# Altium PCB PCB1.PcbDoc
Units mm, origin at the board's own origin, x right, y up, seen from the top; angles counter-clockwise.
Board outline 28 x 38 mm, 2 copper layers (Top Layer, Bottom Layer), stack 0.325 mm thick; 44 components, 34 nets, 206 pads, 75 vias.
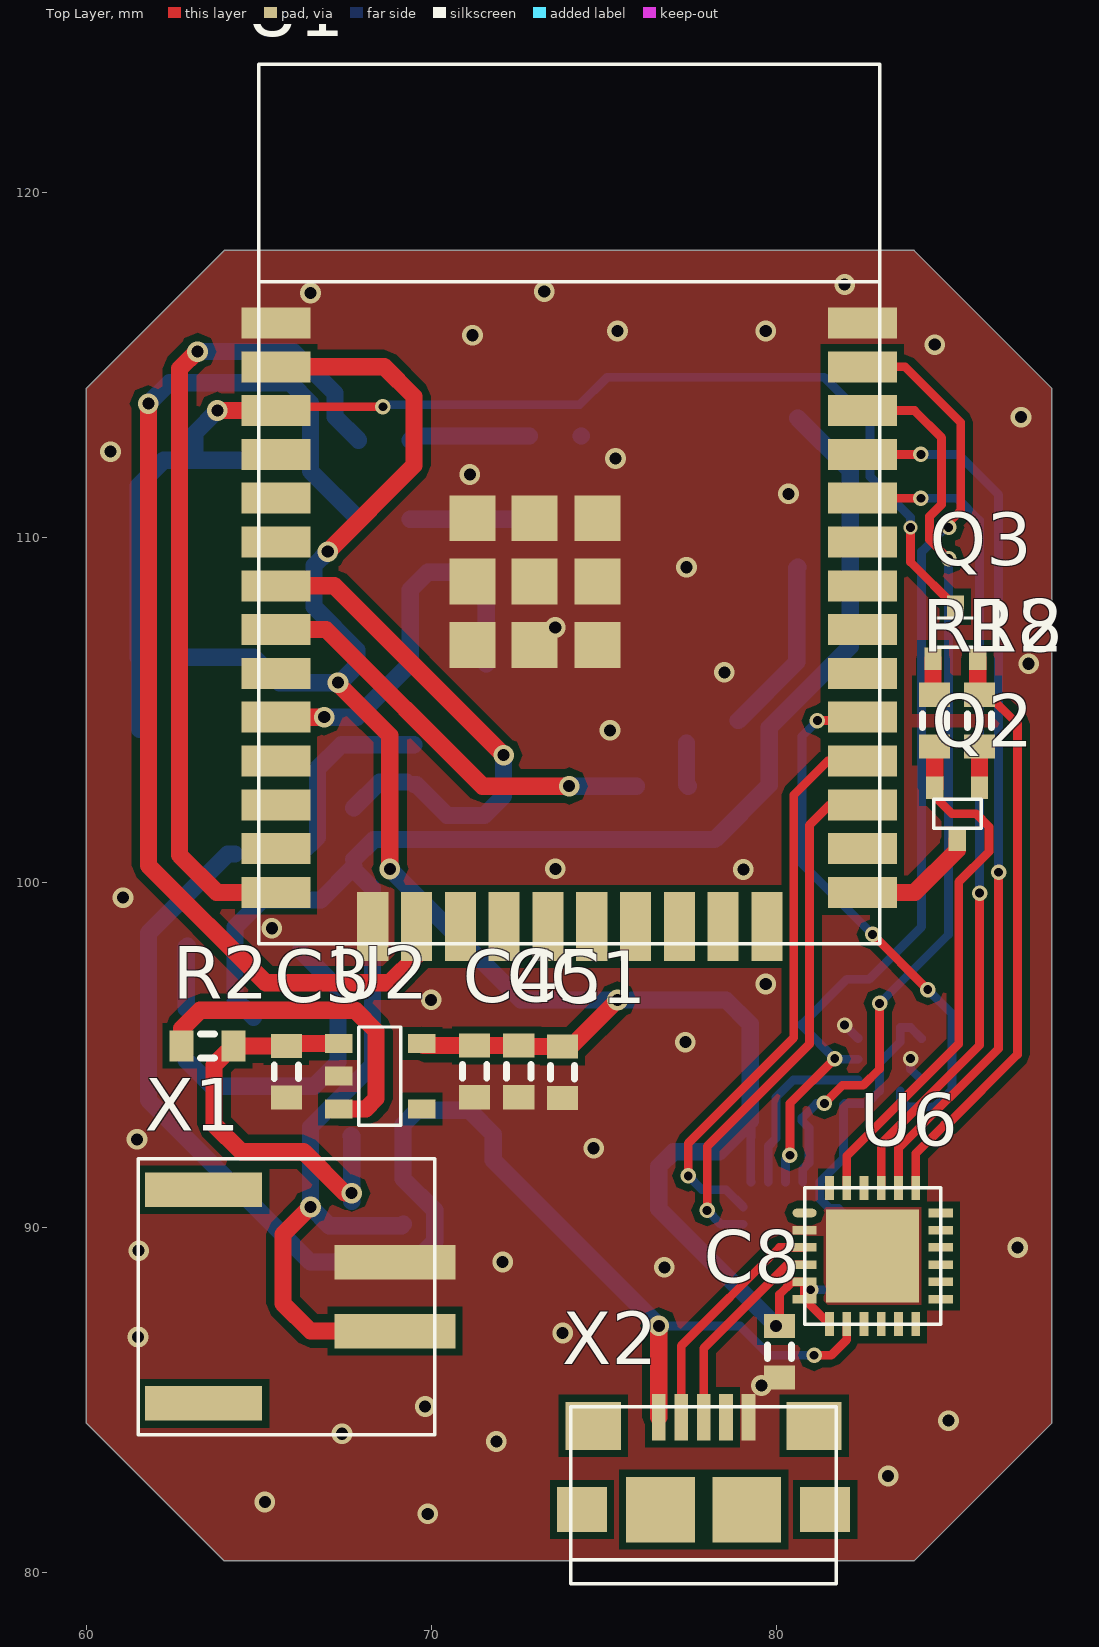
[diagram p0: Top Layer view]
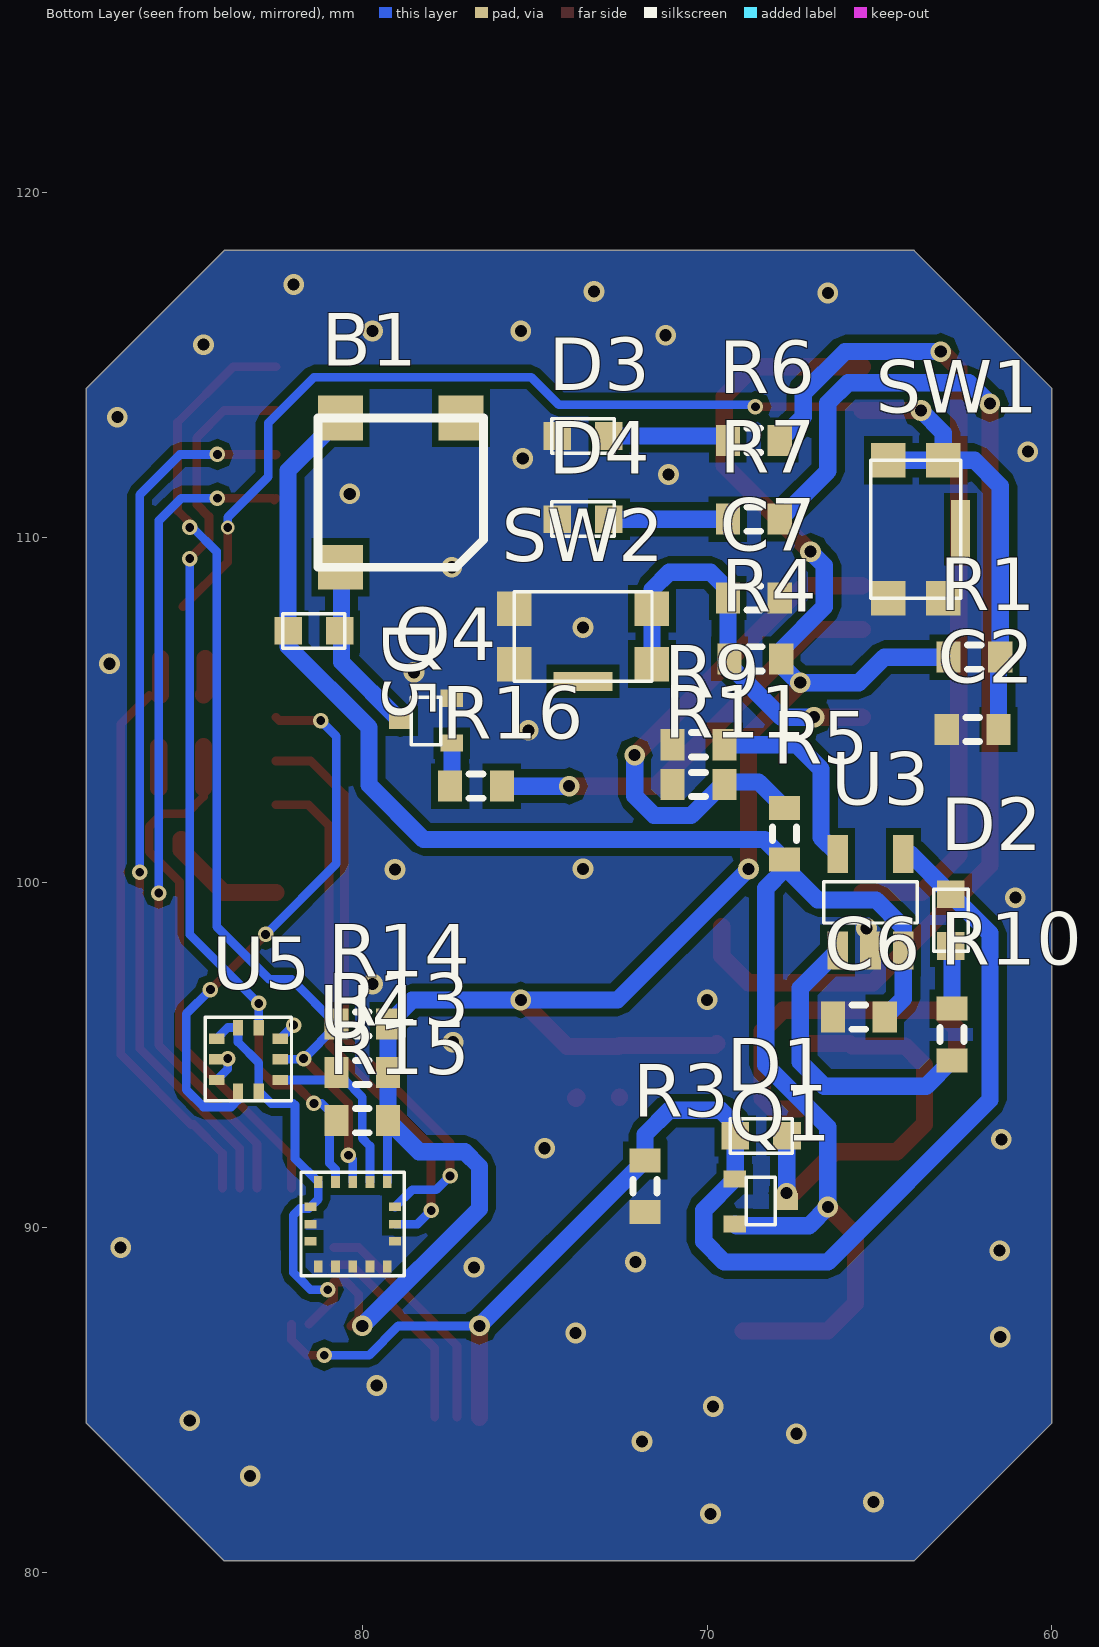
[diagram p1: Bottom Layer view, seen from below]

## Layer stack, top to bottom
Top Solder: solder mask 0.0102, Solder Resist, Dk 3.5
Top Layer: signal copper 0.0356
Dielectric 1: core 0.254, FR-4, Dk 4.2
Bottom Layer: signal copper 0.0356
Bottom Solder: solder mask 0.0102, Solder Resist, Dk 3.5

## Board outline
64,80.333 60,84.333 60,114.333 64,118.333 84,118.333 88,114.333 88,84.333 84,80.333

## Design rules (kind name [scope] priority, off if disabled: settings)
Clearance Clearance_1 [InNamedPolygon('Bottom Layer-No Net') Or  InNamedPolygon('GND_L01_P008')] p1: gap=0.254 ignorepadtopadclearanceinfootprint=FALSE except(0: Arc-Hole Track-Hole SMDPad-Hole THPad-Hole Via-Hole Fill-Hole Poly-Hole Region-Hole Text-Hole)
Clearance [All] p2: gap=0.2 ignorepadtopadclearanceinfootprint=TRUE
PolygonConnect PolygonConnect_5 [All vs IsNamedPolygon('GND_L01_P014')] p1: connectstyle=Direct reliefconductorwidth=0.254 reliefentries=4 polygonreliefangle="90 Angle" airgapwidth=0.254
PolygonConnect PolygonConnect_4 [All vs IsNamedPolygon('GND_L01_P014')] p2: connectstyle=Direct reliefconductorwidth=0.254 reliefentries=4 polygonreliefangle="90 Angle" airgapwidth=0.254
PolygonConnect PolygonConnect_3 [All vs IsNamedPolygon('NONET_L01_P014')] p3: connectstyle=Direct reliefconductorwidth=0.254 reliefentries=4 polygonreliefangle="90 Angle" airgapwidth=0.254
PolygonConnect PolygonConnect_2 [All vs IsNamedPolygon('GND_L02_P013')] p4: connectstyle=Direct reliefconductorwidth=0.254 reliefentries=4 polygonreliefangle="90 Angle" airgapwidth=0.254
PolygonConnect PolygonConnect_1 [All vs IsNamedPolygon('Bottom Layer-No Net') Or  IsNamedPolygon('GND_L01_P008')] p5: thpad.connectstyle=Direct thpad.reliefconductorwidth=0.254 thpad.reliefentries=4 thpad.polygonreliefangle="90 Angle" thpad.airgapwidth=0.254 smdpad.connectstyle=Direct smdpad.reliefconductorwidth=0.254 smdpad.reliefentries=4 smdpad.polygonreliefangle="90 Angle" smdpad.airgapwidth=0.254 via.connectstyle=Relief via.reliefconductorwidth=0.254 via.reliefentries=4 via.polygonreliefangle="90 Angle" via.airgapwidth=0.254
PolygonConnect [All] p6: connectstyle=Relief reliefconductorwidth=0.254 reliefentries=4 polygonreliefangle="90 Angle" airgapwidth=0.254
RoutingVias [All] p1: holewidth=0.711 width=1.27 viastyle="Through Hole" minholewidth=0.711 minwidth=1.27 maxholewidth=0.711 maxwidth=1.27
SolderMaskExpansion [All] p1: expansion=0.102
UnConnectedPin [All] p1:
Width [All] p1: maxlimit=0.5 minlimit=0.1 preferedwidth=0.254 minimp=50.000000 maximp=50.000000 favimp=50.000000
30 further rules are at their usual default settings.

## Components (designator, comment, footprint, x,y, rotation, side; value= is the part's Value field where it differs from the comment)
B1 "Magnetic Buzzer Transducer" "CMT-0502 Buzzer" 78.932,112.572 r270 bottom
C1 "Cap Semi" J1-0603 73.809,94.503 r90 top value=100pF
C2 "Cap Semi" J1-0603 62.3,104.441 r180 bottom value=100pF
C3 "Cap Semi" J1-0603 65.799,94.518 r90 top value=100pF
C4 "Cap Semi" J1-0603 71.26,94.53 r90 top value=100pF
C5 "Cap Semi" J1-0603 72.539,94.53 r90 top value=100pF
C6 "Cap Semi" J1-0603 65.6,96.1 r180 bottom value=100pF
C7 "Cap Semi" J1-0603 68.645,108.254 r0 bottom value=100pF
C8 "Cap Semi" J1-0603 80.1,86.4 r90 top value=100pF
D1 "MBR120_Diode" SML_LED 68.432,92.662 r180 bottom
D2 "Green" SML_LED 62.931,98.915 r270 bottom
D3 "Green" SML_LED 73.598,112.953 r0 bottom
D4 "Green" SML_LED 73.598,110.54 r0 bottom
D5 "Diode" SML_LED 81.4,107.3 r0 bottom
Q1 "DMG3415U" SOT323 69.194,91.407 r180 bottom
Q2 "NPN BJT Transistor" SOT323 85.9,102.75 r270 top
Q3 "NPN BJT Transistor" SOT323 84.55,106.5 r90 top
Q4 "NPN BJT Transistor" SOT323 77.4,104.05 r0 bottom
R1 "Res3" J1-0603 62.25,106.541 r180 bottom value=1K
R2 "Res3" J1-0603 63.513,95.268 r180 top value=1K
R3 "Res3" J1-0603 71.8,91.2 r270 bottom value=1K
R4 "Res3" J1-0603 68.6,106.491 r0 bottom value=1K
R5 "Res3" J1-0603 67.757,101.421 r90 bottom value=1K
R6 "Res3" J1-0603 68.645,112.826 r0 bottom value=1K
R7 "Res3" J1-0603 68.645,110.54 r0 bottom value=1K
R8 "Res3" J1-0603 85.9,104.7 r270 top value=1K
R9 "Res3" J1-0603 70.25,104 r180 bottom value=1K
R10 "Res3" J1-0603 62.9,95.6 r90 bottom value=1K
R11 "Res3" J1-0603 70.25,102.85 r0 bottom value=1K
R12 "Res3" J1-0603 84.6,104.7 r90 top value=1K
R13 "Res3" J1-0603 80,94.5 r180 bottom value=1K
R14 "Res3" J1-0603 80,95.9 r180 bottom value=1K
R15 "Res3" J1-0603 80,93.1 r180 bottom value=1K
R16 "Res3" J1-0603 76.7,102.8 r180 bottom value=1K
SW1 "KMR2_Microminiature_SMT_Switch" "KMR 2 Microswitch" 63.05,111.248 r270 bottom
SW2 "KMR2_Microminiature_SMT_Switch" "KMR 2 Microswitch" 72.598,106.241 r0 bottom
U1 "ESP32-WROOM-32" ESP_WROOM_32 43.8,119.53 r0 top
U2 "Regulator" SOT25 67.323,95.341 r0 top
U3 "LIPO CHARGER" SOT-23 66.212,98.032 r90 bottom
U4 "LSM6DS33" LSM6DS33 79.575,92.1 r180 bottom
U5 "LPS25H" LPS25HB 83.025,94.075 r90 bottom
U6 "UART/USB Converter" CP2104-GM 80.825,90.425 r0 top
X1 "JST-2PIN_Connector" JST-2PIN 63.4,91.1 r270 top
X2 "MicroB_20329_Connector" Micro_B_USB_smd 76.85,81.75 r0 top

## Footprints (in the part's own frame and the unit in brackets; to place one, negate y for a bottom-side part, rotate by r counter-clockwise, add the part's x,y. Pads: shape width x height; smd on the part's side, far side on the other; paste and mask are expansions set on the pad)
"CMT-0502 Buzzer" [mm]
  rect 1.3x1.3 smd: 1(-0.9,-1.7) 2(3.425,-1.7) NC(-0.9,1.8)
  silkscreen extent -0.9,-2.35 3.42,2.45
CP2104-GM [mm]
  oval 0.7x0.25 smd: 1(0,0)
  rect 0.7x0.25 smd: 2(0,-0.5) 3(0,-1) 4(0,-1.5) 5(0,-2) 6(0,-2.5) 13(3.95,-2.5) 14(3.95,-2) 15(3.95,-1.5) 16(3.95,-1) 17(3.95,-0.5) 18(3.95,0)
  rect 0.25x0.7 smd: 7(0.725,-3.225) 8(1.225,-3.225) 9(1.725,-3.225) 10(2.225,-3.225) 11(2.725,-3.225) 12(3.225,-3.225) 19(3.225,0.725) 20(2.725,0.725) 21(2.225,0.725) 22(1.725,0.725) 23(1.225,0.725) 24(0.725,0.725)
  rect 2.7x2.7 smd: 25(1.975,-1.25)
  silkscreen extent 0,-3.23 3.95,0.73
ESP_WROOM_32 [mm]
  rect 2x0.9 smd: 1(21.7,-3.3) 2(21.7,-4.57) 3(21.7,-5.84) 4(21.7,-7.11) 5(21.7,-8.38) 6(21.7,-9.65) 7(21.7,-10.92) 8(21.7,-12.19) 9(21.7,-13.46) 10(21.7,-14.73) 11(21.7,-16) 12(21.7,-17.27) 13(21.7,-18.54) 14(21.7,-19.81) 25(38.7,-19.81) 26(38.7,-18.54) 27(38.7,-17.27) 28(38.7,-16) 29(38.7,-14.73) 30(38.7,-13.46) 31(38.7,-12.19) 32(38.7,-10.92) 33(38.7,-9.65) 34(38.7,-8.38) 35(38.7,-7.11) 36(38.7,-5.84) 37(38.7,-4.57) 38(38.7,-3.3)
  rect 0.9x2 smd: 15(24.505,-20.8) 16(25.775,-20.8) 17(27.045,-20.8) 18(28.315,-20.8) 19(29.585,-20.8) 20(30.855,-20.8) 21(32.125,-20.8) 22(33.395,-20.8) 23(34.665,-20.8) 24(35.935,-20.8)
  rect 1.33x1.33 smd: 39(27.4,-12.638) 39(27.4,-10.8) 39(27.4,-8.963) 39(29.2,-12.638) 39(29.2,-10.8) 39(29.2,-8.962) 39(31.025,-12.638) 39(31.025,-10.8) 39(31.025,-8.962)
  silkscreen extent 21.2,-21.3 39.2,4.2
J1-0603 [mm] "Chip Resistor, Body 1.6x0.8mm, IPC High Density"
  rect 0.7x0.9 smd: 1(-0.75,0) 2(0.75,0)
  silkscreen extent -0.2,-0.35 0.2,0.35, body extent -0.85,-0.48 0.85,0.48, height 0.9
JST-2PIN [mm]
  rect 1x3.5 smd: 1(2.1,5.55) 2(4.1,5.55)
  rect 1x3.4 smd: NC(0,0) NC(6.2,0)
  silkscreen extent -0.9,-1.9 7.1,6.7
"KMR 2 Microswitch" [mm]
  rect 1x1 smd: 1(-1,-0.1) 2(-1,-1.7) 3(3,-0.1) 4(3,-1.7)
  rect 1.7x0.55 smd: GND(1,0.4)
  silkscreen extent -1,-2.2 3,0.4
LPS25HB [mm]
  rect 0.45x0.3 smd: 1(1.725,0.575) 2(1.725,-0.025) 6(-0.115,-0.025) 7(-0.115,0.575)
  rect 0.3x0.45 smd: 3(1.405,-0.645) 4(0.805,-0.645) 5(0.205,-0.645) 8(0.205,1.195) 9(0.805,1.195) 10(1.405,1.195)
  silkscreen extent -0.4,-0.98 2.02,1.53
LSM6DS33 [mm]
  rect 0.25x0.35 smd: 1(-1.7,-0.775) 2(-1.2,-0.775) 3(-0.7,-0.775) 4(-0.2,-0.775) 5(0.3,-0.775) 9(0.3,-3.225) 10(-0.2,-3.225) 11(-0.7,-3.225) 12(-1.2,-3.225) 13(-1.7,-3.225)
  rect 0.35x0.25 smd: 6(0.525,-1.5) 7(0.525,-2) 8(0.525,-2.5) 14(-1.925,-2.5) 15(-1.925,-2) 16(-1.925,-1.5)
  silkscreen extent -2.2,-3.5 0.8,-0.5
Micro_B_USB_smd [mm]
  rect 0.4x1.35 smd: 1(-0.25,2.75) 2(0.4,2.75) 3(1.05,2.75) 4(1.7,2.75) 5(2.35,2.75)
  rect 1.45x1.3 smd: NC(-2.475,0.075) NC(4.575,0.075)
  rect 1.6x1.4 smd: NC(-2.15,2.5) NC(4.25,2.5)
  rect 2x1.9 smd: NC(-0.2,0.075) NC(2.3,0.075)
  silkscreen extent -2.8,-2.07 4.9,3.05
SML_LED [mm]
  rect 0.8x0.8 smd: 1(-0.75,0) 2(0.75,0)
  silkscreen extent -0.9,-0.5 0.9,0.5
SOT25 [mm]
  rect 0.8x0.55 smd: 1(0,0) 2(0,-0.95) 3(0,-1.9) 4(2.4,-1.9) 5(2.4,0)
  silkscreen extent 0.58,-2.38 1.8,0.47
SOT323 [mm]
  rect 0.65x0.5 smd: 1(0,-1.3) 2(0,0) 3(1.5,-0.65)
  silkscreen extent 0.33,-1.33 1.17,0.05
SOT-23 [mm]
  rect 1.1x0.6 smd: 1(0,0) 2(0,-0.95) 3(0,-1.9) 4(2.8,-1.9) 5(2.8,0)
  silkscreen extent 0.8,-2.3 2,0.4

## Part data
B1: library part CMT-0502-75-SMT-TR
C1 C2 C3 C4 C5 C6 C7 C8: "Capacitor (Semiconductor SIM Model)", LatestRevisionDate=29-May-2009, LatestRevisionNote="IPC-7351 Footprint Added.", PackageDescription="Chip Capacitor", PackageReference=C1206, Published=8-Jun-2000, Publisher="Altium Limited"
D2 D3 D4: library part SML-LX0603GW-TR_LED_Diode
D5: "Default Diode", Code_JEDEC=DO-214-AB, LatestRevisionDate=17-Jul-2002, LatestRevisionNote="Re-released for DXP Platform.", PackageDescription="DO-214-AB/SMC; 2 C-Bend Leads; Body 7.9 x 5.9 mm, inc. leads (LxW)", PackageReference=SMC, PackageVersion=Sep-1996, Published=8-Jun-2000, Publisher="Altium Limited"
Q2 Q3 Q4: library part 2sd1484k
R1 R2 R3 R4 R5 R6 R7 R8 R9 R10 R11 R12 R13 R14 R15 R16: "Resistor", LatestRevisionDate=29-May-2009, LatestRevisionNote="IPC-7351 Footprint Added.", PackageDescription="Chip Resistor", PackageReference=J1-0603, Published=8-Jun-2000, Publisher="Altium Limited"
U2: library part AP2112-3.3
U3: library part MCP7381/2
U6: library part CP2104

## Via types
v1: diameter 0.6, hole 0.35, Top Layer to Bottom Layer, 54 vias
v2: diameter 0.45, hole 0.256, Top Layer to Bottom Layer, 20 vias
v3: diameter 0.4, hole 0.256, Top Layer to Bottom Layer, 1 vias

## Nets (pads, with @x,y where several pads share a name; then routed paths per layer and width w, separated by ;. In a path a pad name is that pad's centre, name@x,y a point inside that pad or via, vN(x,y) a via of type N, cw(c..) or ccw(c..) an arc to the next point about the centre after c; other vN are vias at no path point)
3.3V: C1.2 C4.2 C5.2 C8.2 R1.1 R4.1 R13.2 R14.2 R15.2 U1.2 U2.5 U4.1 U4.5 U4.16 U5.1 U5.6 U5.10 U6.5 U6.6 U6.7 | length 71.8
  Top Layer w0.254: C8.2@80.325,87.15 80.1,87.375 80.1,88.058 80.467,88.425 U6.5 U6.6 U6.7
  Top Layer w0.5: U1.2 68.64,114.96 69.5,114.1 69.5,112.1 v1(67,109.6) ; v1(67.3,105.8) 67.3,105.77 68.8,104.27 v1(68.8,100.4) ; U2.5 69.784,95.28 C4.2 C5.2 72.566,95.253 C1.2 74.053,95.253 v1(75.4,96.6)
  Bottom Layer w0.254: R15.2 79.275,93.075 79.275,92.617 79.269,92.611 79.269,91.331 U4.5 ; v2(81,88.2) 81.5,88.2 81.8,88.5 82,88.7 82,89.338 82.002,89.34 82.002,90.36 81.81,90.552 81.548,90.552 U4.16 81.275,90.825 U4.1 81.952,92.002 81.952,93.552 82,93.6 82.64,93.6 U5.6 83,94.781 83.6,95.381 U5.1 83.9,95.8 U5.10
  Bottom Layer w0.5: R1.1 64.859,106.541 65.6,105.8 v1(67.3,105.8) 67.346,105.8 R4.1@67.895,106.349 ; v1(67,109.6) 66.6,109.2 66.6,108 67.85,106.75 R4.1 ; v1(68.8,100.4) 72.6,96.6 v1(75.4,96.6) 78.55,96.6 R14.2 R15.2 78.35,92.2 77.029,92.2 76.6,91.771 76.6,90.55 v1(80,87.15)
DTR: Q2.1 R12.1 U6.23 | length 15.6
  Top Layer w0.254: U6.23 82.05,92.076 85.3,95.326 85.3,100.025 86.175,100.9 86.175,101.625 85.8,102 85.1,102 84.6,102.5 Q2.1
  Top Layer w0.5: Q2.1 R12.1
GND: C1.1 C2.1 C3.1 C4.1 C5.1 C6.1 C7.1 C8.1 D3.2 D4.2 Q4.1 R3.2 R9.1 R11.2 SW1.3 SW1.4 SW2.3 SW2.4 U1.1 U1.15 U1.38 U1.39 U2.2 U3.2 U4.8 U4.9 U4.10 U4.11 U4.12 U4.13 U4.15 U5.3 U5.8 U5.9 U6.2 U6.25 X1.1 X2.5 | length 1.4
  Top Layer w0.5: C1.1@73.782,93.78 C1.1
  Bottom Layer w0.254: v2(81.988,95.871) U5.3 U5.3@82.38,95.497 ; v2(83.9,94.9) 83.9,94.6 U5.8
  other v1: 69.9,81.7 65.176,82.042 83.25,82.8 71.889,83.8 67.412,84.023 85,84.402 69.825,84.811 79.578,85.42 61.5,86.829 73.812,86.944 76.759,88.849 72.074,89 61.519,89.332 87.004,89.425 74.711,92.3 61.468,92.558 77.368,95.377 70,96.604 79.7,97.061 65.38,98.679 61.063,99.567 79.05,100.382 73.601,100.401 75.184,104.419 78.5,106.1 87.325,106.35 73.598,107.4 77.4,109.147 80.362,111.274 71.12,111.836 75.346,112.3 60.7,112.5 87.1,113.5 84.6,115.6 71.2,115.875 75.4,116 79.7,116 66.5,117.1 73.279,117.145 81.988,117.348
GPIO0: Q2.3 U1.25 | length 3.6
  Top Layer w0.5: U1.25 84.02,99.72 85.25,100.95 Q2.3
I35: R5.2 R11.1 U1.7 | length 14.9
  Top Layer w0.5: U1.7 67.19,108.61 v1(72.1,103.7)
  Bottom Layer w0.5: R5.2 68.507,102.921 R11.1@69.281,102.921 ; R11.1 69.564,102.85 70.464,101.95 71.536,101.95 72.1,102.514 v1(72.1,103.7)
INT1: U1.27 U4.7 | length 15.4
  Top Layer w0.254: v2(78,90.5) 78.004,90.504 78.004,92.358 80.966,95.32 80.966,101.666 81.56,102.26 U1.27
  Bottom Layer w0.254: v2(78,90.5) 78.4,90.1 U4.7
INT2: U1.28 U4.6 | length 16.7
  Top Layer w0.254: v2(77.452,91.5) 77.452,92.448 80.512,95.508 80.512,102.545 81.497,103.53 U1.28
  Bottom Layer w0.254: v2(77.452,91.5) 77.852,91.1 78.55,91.1 U4.6
INT3: U1.29 U5.7 | length 16.1
  Top Layer w0.254: v2(81.2,104.7) 82.4,104.7 U1.29 ; v2(82.8,98.5) v2(84.4,96.9)
  Bottom Layer w0.254: v2(81.2,104.7) 80.75,104.25 80.75,100.55 v2(82.8,98.5) ; U5.7 83.6,93.7 83.8,93.5 84.6,93.5 85.1,94 85.1,96.2 v2(84.4,96.9)
IO12: R6.1 U1.14 | length 24.2
  Top Layer w0.5: v1(63.225,115.4) 63.2,115.4 62.7,114.9 62.7,100.8 63.78,99.72 U1.14
  Bottom Layer w0.5: v1(63.225,115.4) 66,115.4 67.211,114.189 67.211,113.51 R6.1
IO13: R7.1 U1.16 | length 32.9
  Top Layer w0.5: v1(61.8,113.889) 61.8,100.5 65.2,97.1 68.8,97.1 69.575,97.875 U1.16
  Bottom Layer w0.5: v1(61.8,113.889) 62.411,114.5 65.91,114.5 66.5,113.91 66.5,111.935 R7.1
IO25: C7.2 R4.2 SW2.1 SW2.2 U1.10 | length 11.5
  Top Layer w0.5: U1.10 v1(66.9,104.8)
  Bottom Layer w0.5: v1(66.9,104.8) 67.846,104.8 69.395,106.349 C7.2 69.395,108.495 69.9,109 71.1,109 71.598,108.502 SW2.2 SW2.1
IO32: R16.2 U1.8 | length 12.3
  Top Layer w0.5: U1.8 66.95,107.34 71.49,102.8 v1(74,102.8)
  Bottom Layer w0.5: v1(74,102.8) R16.2
NetB1_2: B1.2 D5.1 Q4.3 | length 5.2
  Bottom Layer w0.5: Q4.3 80.6,106.4 80.6,109.115 B1.2
NetC3_2: C3.2 D1.2 Q1.3 R2.1 U2.1 | length 12.3
  Top Layer w0.5: U2.1 65.872,95.341 C3.2 R2.1 63.7,94.705 63.7,93 64.5,92.2 66.3,92.2 67.5,91 v1(67.694,91)
  Bottom Layer w0.5: D1.2 67.694,92.65 v1(67.694,91) Q1.3
NetD2_2: D2.2 R10.2 | length 1.8
  Bottom Layer w0.5: R10.2 62.9,98.134 D2.2
NetD3_1: D3.1 R6.2 | length 3.5
  Bottom Layer w0.5: R6.2 69.522,112.953 D3.1
NetD4_1: D4.1 R7.2 | length 3.5
  Bottom Layer w0.5: R7.2 D4.1
NetQ2_2: Q2.2 R8.2 | length 1.2
  Top Layer w0.5: Q2.2 R8.2
NetQ3_2: Q3.2 R12.2 | length 1.1
  Top Layer w0.5: Q3.2 84.55,105.5 R12.2
NetQ4_2: Q4.2 R16.1 | length 1.3
  Bottom Layer w0.5: Q4.2 77.4,102.85 R16.1
NetR2_2: R2.2 U2.3 | length 9.8
  Top Layer w0.5: R2.2 62.763,95.763 63.3,96.3 67.8,96.3 68.4,95.7 68.4,93.741 68.1,93.441 U2.3
NetR9_2: R9.2 U3.5 | length 5.8
  Bottom Layer w0.5: U3.5 66.7,101.32 66.7,103.3 67.4,104 R9.2
NetR10_1: R10.1 U3.1 | length 8.7
  Bottom Layer w0.5: R10.1 63.65,94.1 66.6,94.1 67.3,94.8 67.3,96.944 U3.1
NetR13_1: R13.1 U4.4 U5.5 | length 5.1
  Bottom Layer w0.254: U4.4 79.775,92.363 80,92.588 80,93.78 80.5,94.28 U5.5
NetU6_3: U6.3 X2.2 | length 6.8
  Top Layer w0.254: X2.2 77.25,86.575 80.1,89.425 U6.3
NetU6_4: U6.4 X2.3 | length 5.9
  Top Layer w0.254: X2.3 77.9,86.5 80.325,88.925 U6.4
RESET: C2.2 Q3.3 R1.2 SW1.1 SW1.2 U1.3 | length 38.5
  Top Layer w0.254: U1.3 65.61,113.8 v2(68.6,113.8) ; v3(83.9,110.3) 83.9,109.3 Q3.3
  Top Layer w0.5: v1(63.8,113.69) U1.3
  Bottom Layer w0.254: v2(68.6,113.8) 68.658,113.858 74.3,113.858 75.1,114.658 81.4,114.658 82.727,113.331 82.727,111.773 83.9,110.6 v3(83.9,110.3)
  Bottom Layer w0.5: C2.2 61.55,106.491 R1.2 61.5,111.5 62.248,112.248 SW1.1 ; v1(63.8,113.69) 63.15,113.04 SW1.1 ; SW1.2@64.7,112.248 SW1.1
RTS: Q3.1 R8.1 U6.19 | length 17
  Top Layer w0.254: U6.19 84.05,92.15 84.886,92.986 84.964,92.986 87,95.022 87,100.073 87.004,100.077 87.004,100.534 87,100.538 87,104.6 R8.1@86.175,105.425
  Top Layer w0.5: Q3.1 85.85,105.45 R8.1@85.875,105.425
RXD0: U1.34 U6.21 | length 24.2
  Top Layer w0.254: U1.34 82.55,111.1 82.6,111.15 v2(84.2,111.15) ; U6.21 83.05,92.434 85.9,95.284 v2(85.9,99.7)
  Bottom Layer w0.254: v2(84.2,111.15) 85.25,111.15 85.9,110.5 v2(85.9,99.7)
SCL: R15.1 U1.36 U4.2 U5.2 | length 27.7
  Top Layer w0.254: v2(81.4,93.6) 81.925,94.125 82.525,94.125 83,94.6 v2(83,96.5) ; U1.36 84.01,113.69 84.8,112.9 84.8,110.969 84.446,110.615 84.446,109.954 v2(85,109.4)
  Bottom Layer w0.254: U4.2 80.775,91.694 80.952,91.871 80.952,92.898 R15.1 80.75,93.175 81.175,93.6 v2(81.4,93.6) ; U5.2 v2(83,96.5) 85,98.5 v2(85,109.4)
SDA: R14.1 U1.37 U4.3 U5.4 | length 29.7
  Top Layer w0.254: v2(80.4,92.1) 80.4,93.6 v2(81.7,94.9) ; U1.37 83.74,114.96 85.354,113.346 85.354,110.793 84.9,110.339 84.939,110.3 v2(85,110.3)
  Bottom Layer w0.254: U4.3 80.275,91.975 v2(80.4,92.1) ; U5.4 81.72,94.88 v2(81.7,94.9) 80.75,95.85 R14.1 82.05,97.2 82.7,97.2 84.22,98.72 84.22,109.601 84.919,110.3 v2(85,110.3)
TXD0: U1.35 U6.20 | length 25.8
  Top Layer w0.254: U1.35 82.52,112.4 82.54,112.42 v2(84.2,112.42) ; U6.20 83.55,92.292 86.452,95.194 v2(86.452,100.306)
  Bottom Layer w0.254: v2(84.2,112.42) 85.28,112.42 86.452,111.248 v2(86.452,100.306)
VBAT: B1.1 C6.2 D5.2 Q1.1 R5.1 U3.3 X1.2 | length 52.7
  Top Layer w0.5: v1(66.5,90.6) 65.7,89.8 65.7,87.8 66.5,87 X1.2
  Bottom Layer w0.5: C6.2 64.312,96.638 U3.3 64.312,98.712 65.1,99.5 66.794,99.5 67.757,100.463 67.757,100.382 68.3,99.839 68.3,94.716 66.5,92.916 v1(66.5,90.6) 67.043,90.057 69.144,90.057 Q1.1 ; R5.1 68.336,101.25 78.218,101.25 79.8,102.832 79.8,104.5 82.15,106.85 D5.2 82.15,111.954 B1.1
VBUS: D1.1 D2.1 Q1.2 R3.1 U3.4 U6.8 X2.1 | length 42.3
  Top Layer w0.254: v2(81.1,86.3) 81.6,86.3 82.05,86.75 U6.8
  Top Layer w0.5: X2.1 v1(76.6,87.15)
  Bottom Layer w0.254: v1(76.6,87.15) 78.95,87.15 79.8,86.3 v2(81.1,86.3)
  Bottom Layer w0.5: U3.4 64.098,100.832 D2.1 61.8,98.534 61.8,93.7 66.5,89 69.5,89 70.1,89.6 70.1,90.501 Q1.2 69.182,91.419 D1.1 69.182,92.982 69.6,93.4 71.1,93.4 71.8,92.7 R3.1 v1(76.6,87.15)
pads on no net: B1.NC SW1.GND SW2.GND U1.4 U1.5 U1.6 U1.9 U1.11 U1.12 U1.13 U1.17 U1.18 U1.19 U1.20 U1.21 U1.22 U1.23 U1.24 U1.26 U1.30 U1.31 U1.32 U1.33 U2.4 U4.14 U6.1 U6.9 U6.10 U6.11 U6.12 U6.13 U6.14 U6.15 U6.16 U6.17 U6.18 U6.22 U6.24 X1.NC X2.4 X2.NC

## Polygon pours and split planes (outlines as drawn)
GND on Bottom Layer "GND_L02_P013" (solid, remove dead copper, pour order 13): 64,80.333 60,84.333 60,114.333 64,118.333 84,118.333 88,114.333 88,84.333 84,80.333
GND on Top Layer "GND_L01_P014" (solid, remove dead copper, pour order 14): 64,80.333 60,84.333 60,114.333 64,118.333 84,118.333 88,114.333 88,84.333 84,80.333